# Altium PCB left_conn.PcbDoc
Units mm, origin at the board's own origin, x right, y up, seen from the top; angles counter-clockwise.
Board outline 104.91 x 135.55 mm, 4 copper layers (Top Layer, Mid-Layer 1, Mid-Layer 2, Bottom Layer), stack 1.58 mm thick; 4 components, 59 nets, 182 pads, 122 vias.
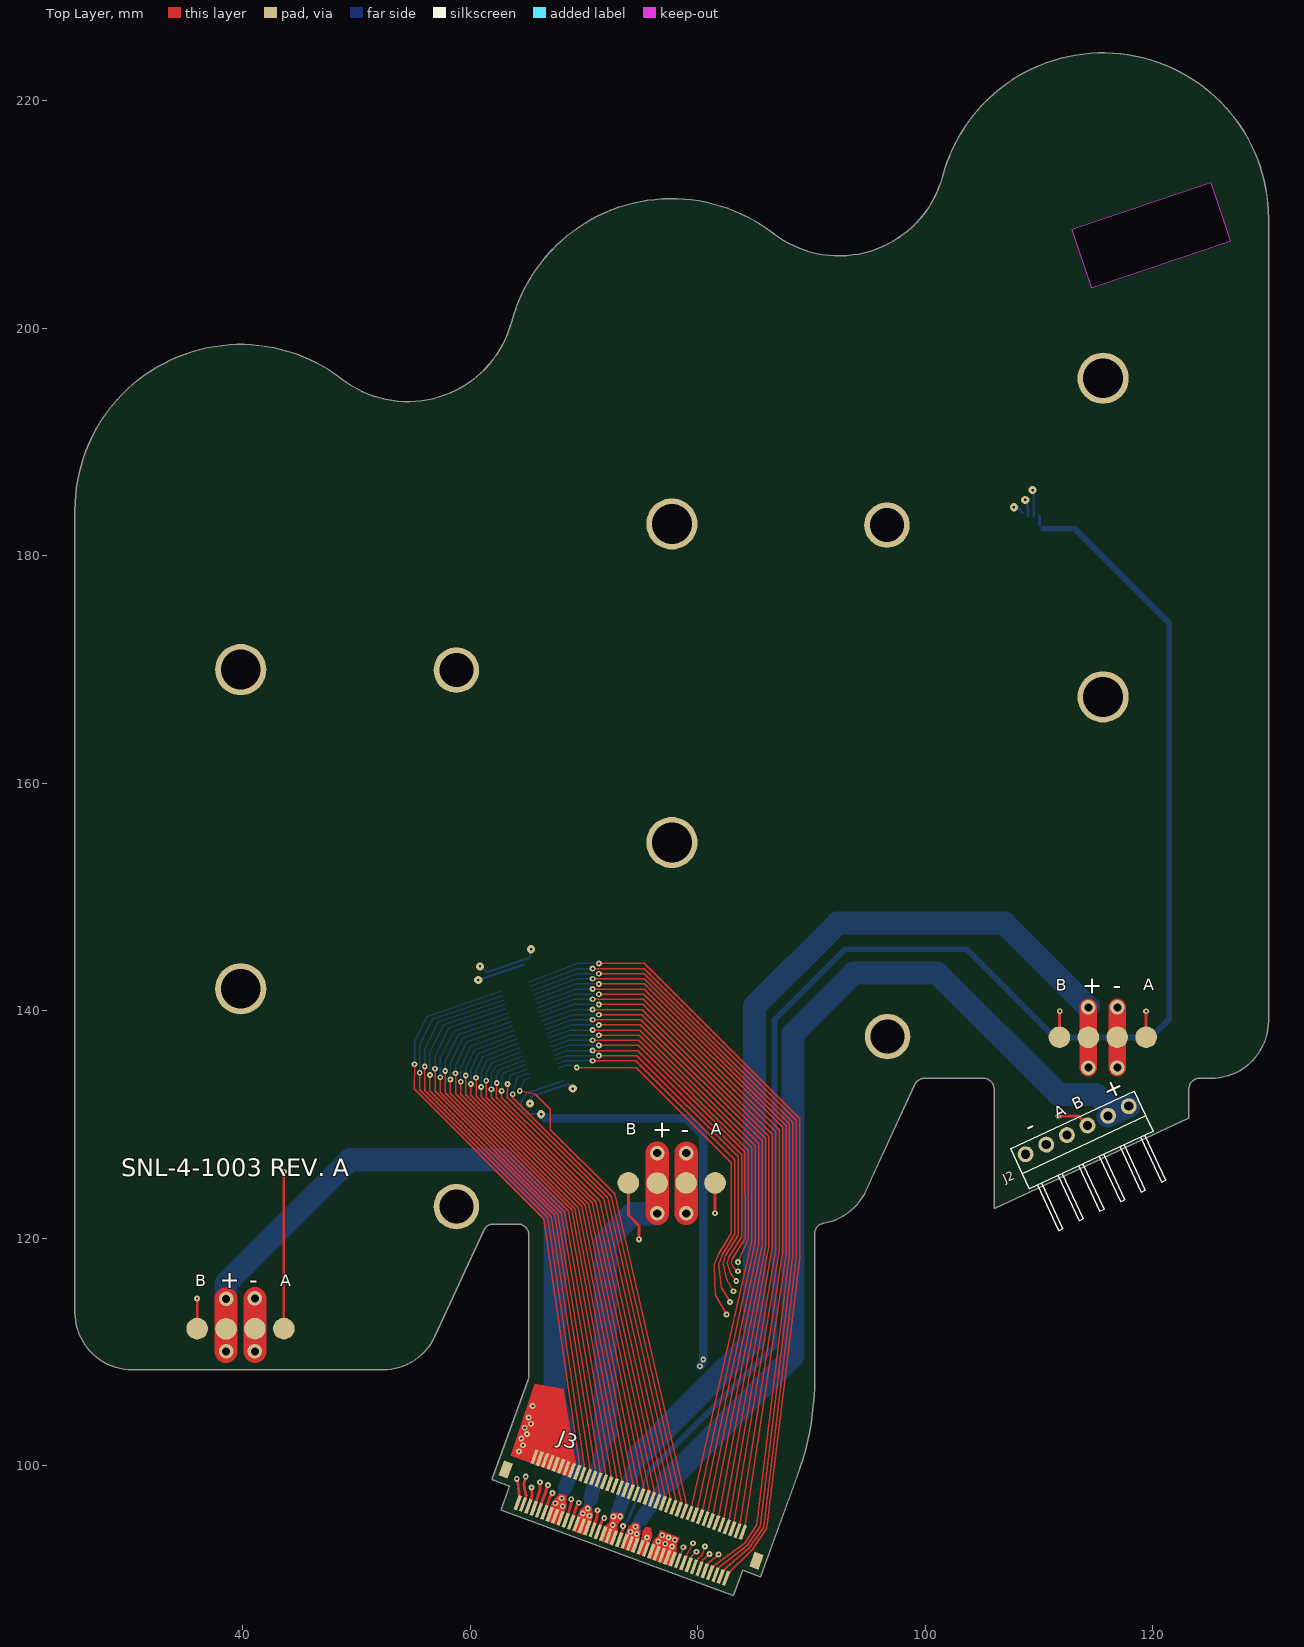
[diagram p0: Top Layer view]
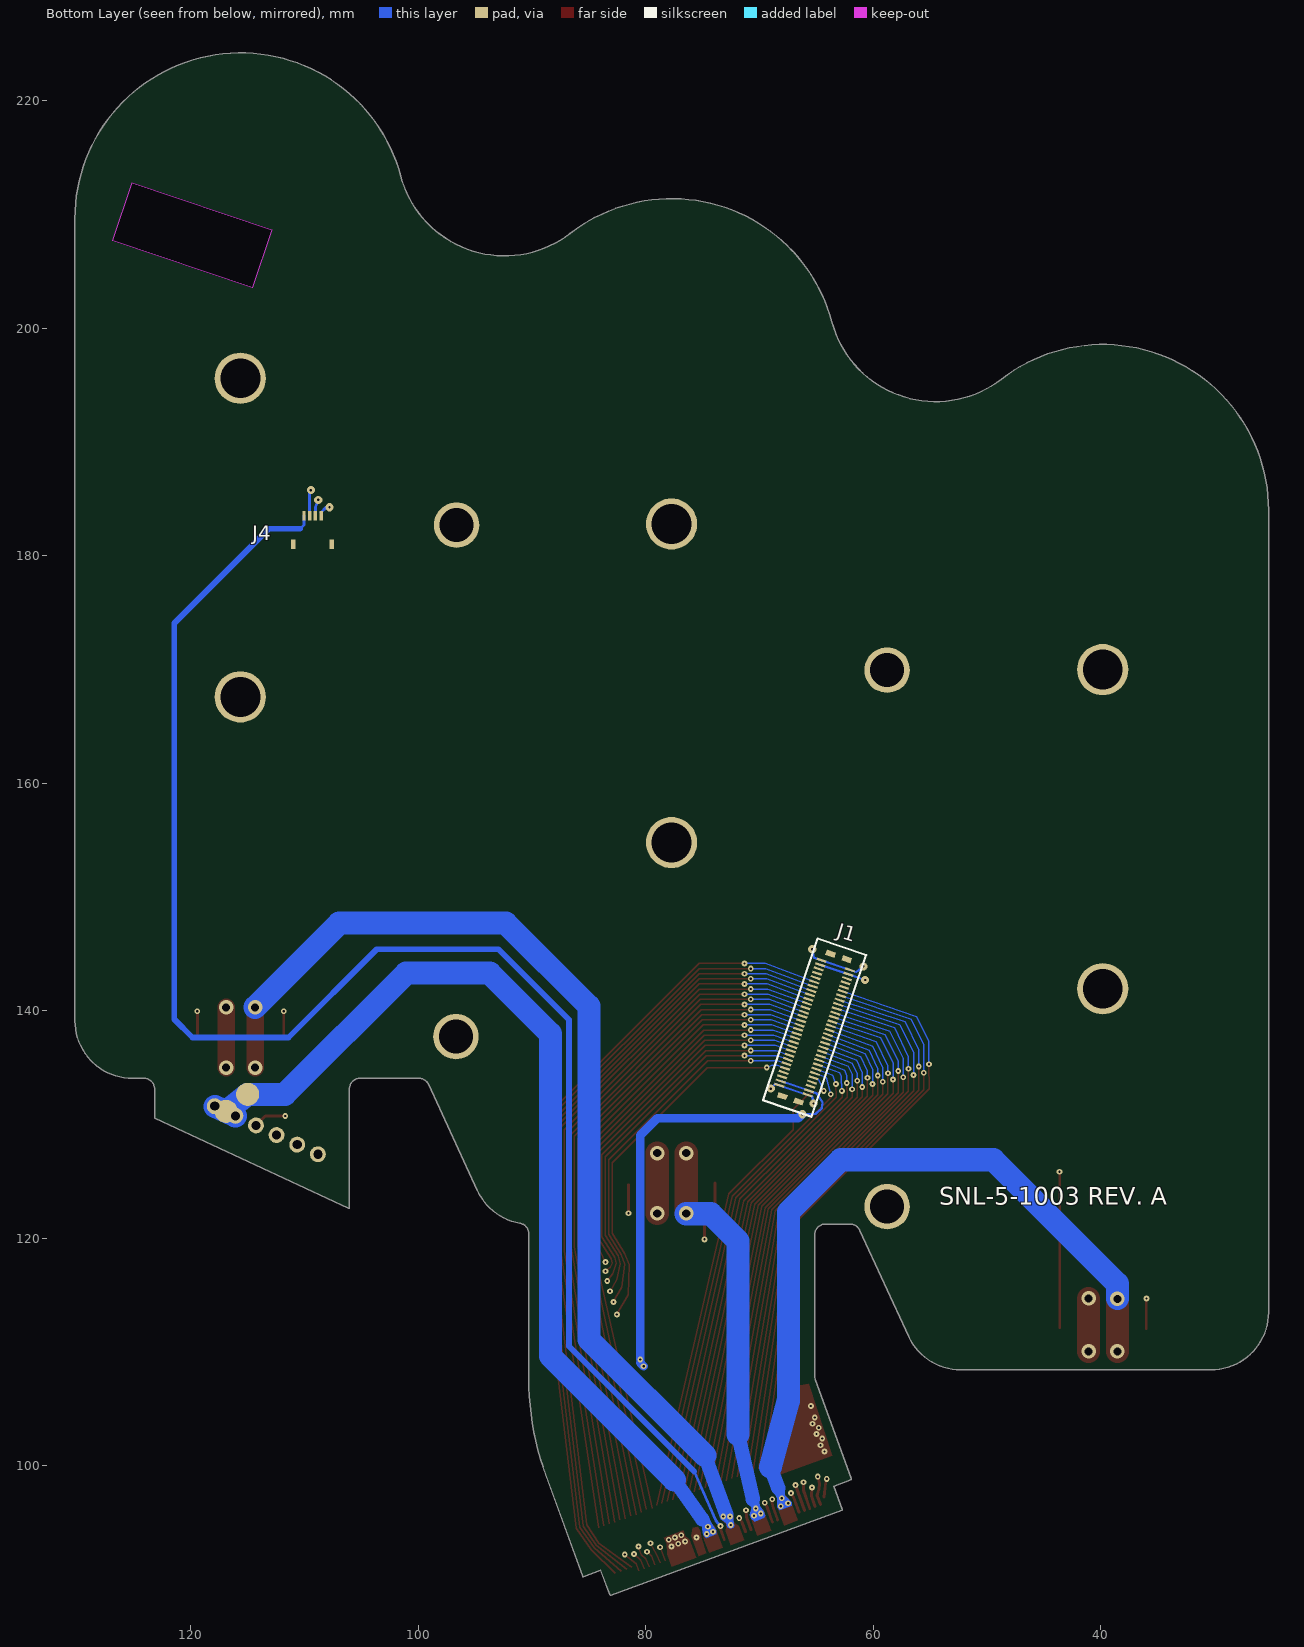
[diagram p1: Bottom Layer view, seen from below]
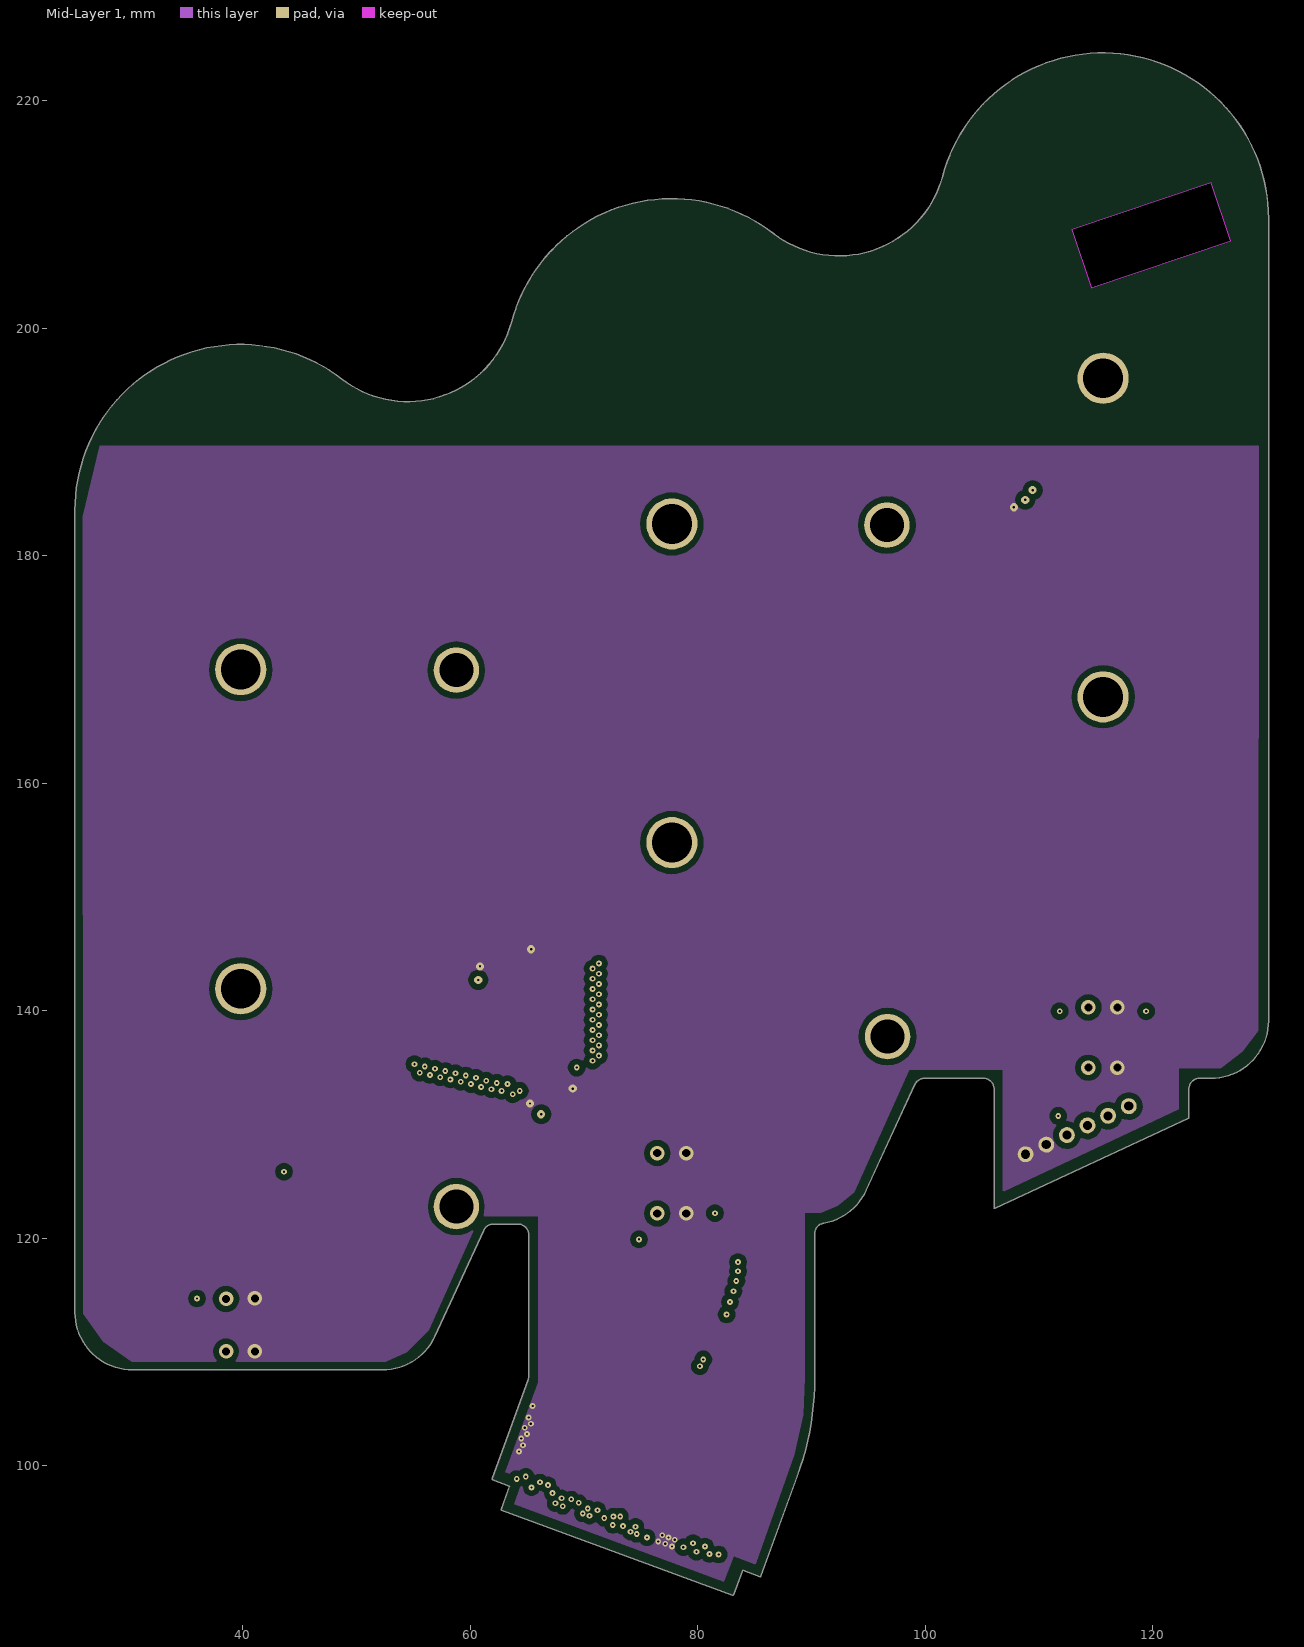
[diagram p2: Mid-Layer 1]
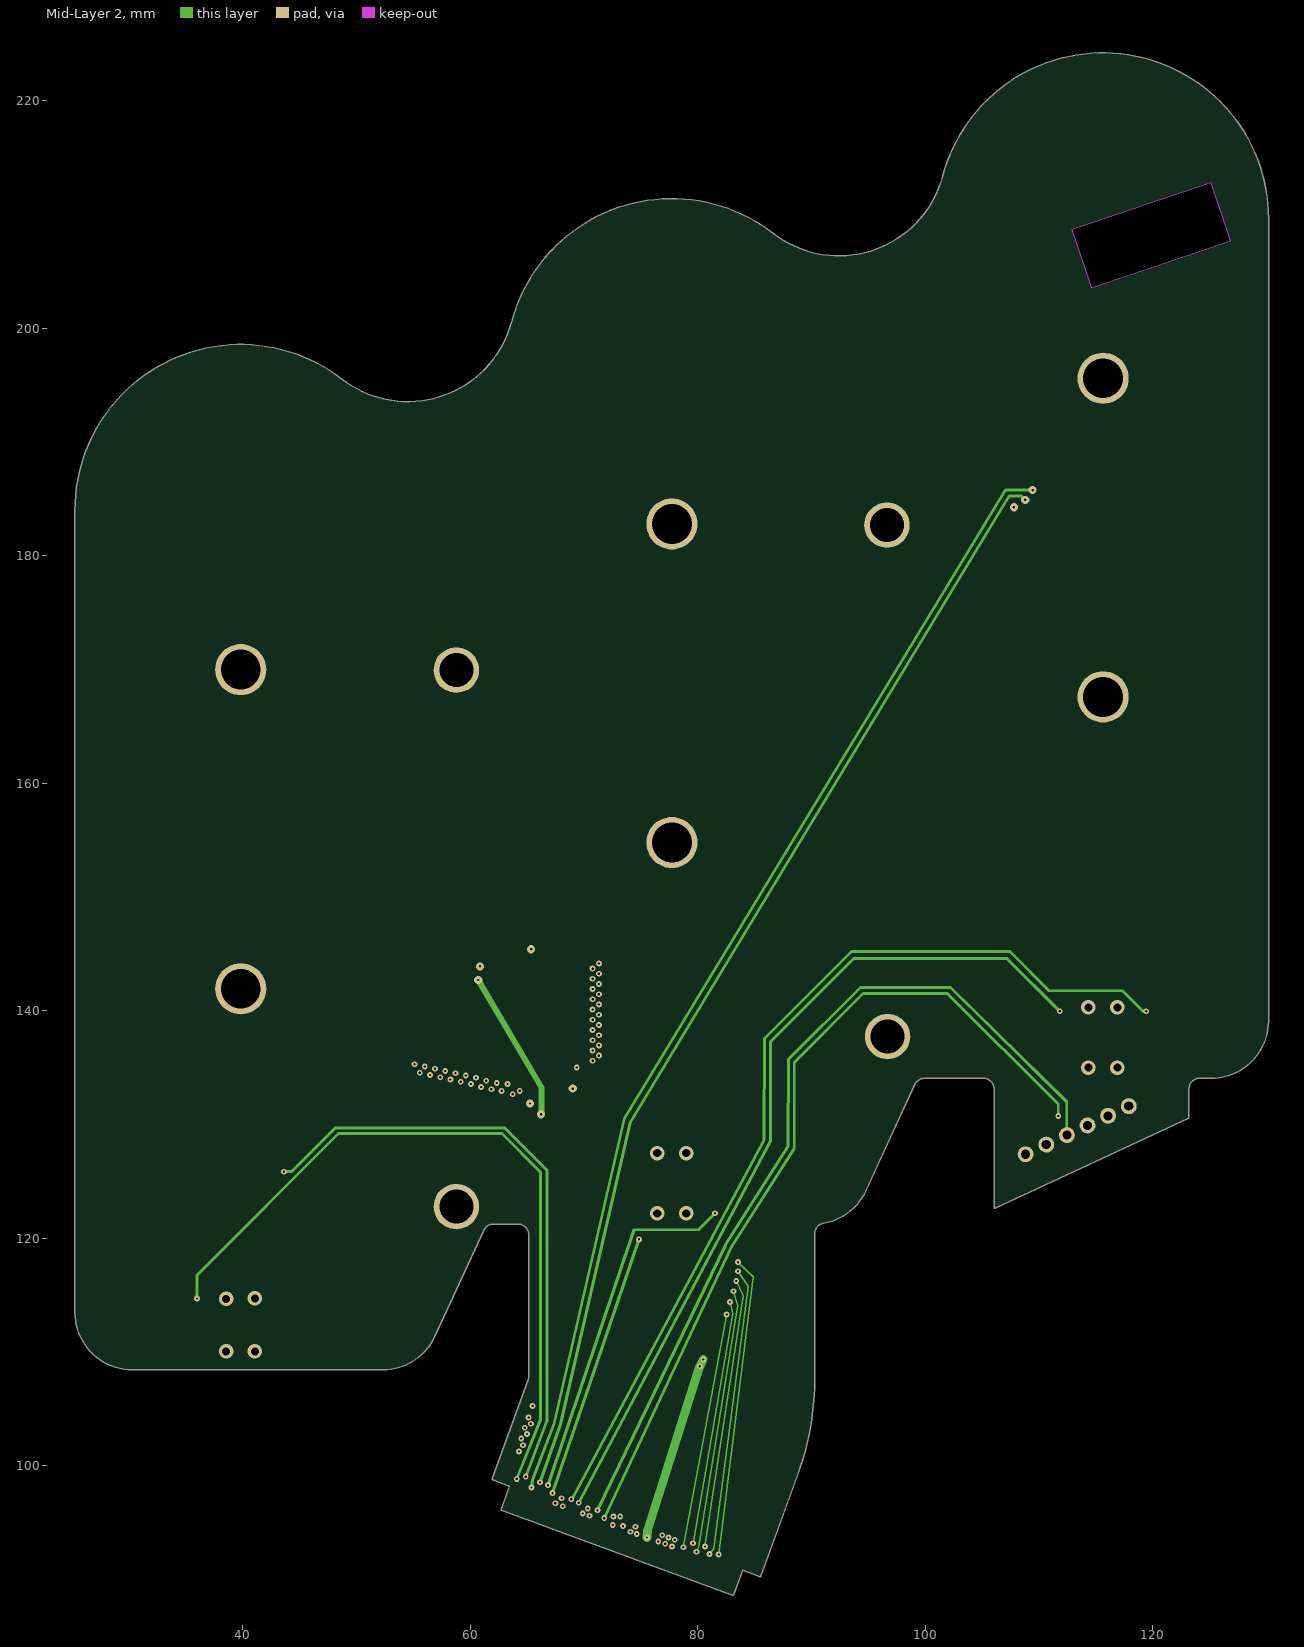
[diagram p3: Mid-Layer 2]

## Layer stack, top to bottom
Top Layer: signal copper 0.0356
Dielectric: prepreg 0.2286, FR-4, Dk 4.8
Mid-Layer 1: signal copper 0.0178
Dielectric: core 1.016, FR-4, Dk 4.8
Mid-Layer 2: signal copper 0.0178
Dielectric: prepreg 0.2286, FR-4, Dk 4.8
Bottom Layer: signal copper 0.0356

## Board outline
61.977,98.79 ccw(c62,98.85) 61.977,98.79 63.469,98.213 62.74,96.171 ccw(c62.8,96.15) 62.778,96.09 ccw(c62.8,96.15) 62.778,96.09 83.078,88.64 cw(c83.1,88.7) 83.078,88.64 ccw(c83.1,88.7) 83.16,88.677 83.987,90.818 85.485,90.249 ccw(c85.508,90.309) 85.568,90.287 88.78,99.143 ccw(c88.72,99.165) 88.781,99.143 ccw(c65.228,107.715) 90.292,107.715 ccw(c90.228,107.715) 90.292,107.715 90.292,120.395 cw(c91.228,120.395) 91.068,121.317 ccw(c90.204,126.307) 94.804,124.191 99.09,133.511 ccw(c99.032,133.537) 99.091,133.511 cw(c99.941,133.12) 99.941,134.056 105.12,134.056 cw(c105.12,133.12) 106.057,133.12 106.057,122.692 ccw(c106.12,122.692) 106.147,122.634 123.147,130.562 ccw(c123.12,130.62) 123.184,130.62 123.184,133.12 cw(c124.12,133.12) 124.12,134.056 125.12,134.056 ccw(c125.12,139.12) 130.184,139.12 130.184,209.62 ccw(c115.62,209.62) 101.545,213.358 ccw(c101.606,213.342) 101.544,213.358 ccw(c92.425,215.781) 101.545,213.358 101.544,213.358 cw(c92.425,215.781) 86.646,208.321 ccw(c77.728,196.807) 63.652,200.546 cw(c54.532,202.968) 48.754,195.508 cw(c54.532,202.968) 48.754,195.508 cw(c48.715,195.457) 48.754,195.508 ccw(c39.836,183.994) 25.272,183.994 25.272,113.494 ccw(c30.336,113.494) 30.336,108.43 52.311,108.43 ccw(c52.311,113.494) 56.912,111.378 61.198,120.698 ccw(c61.14,120.725) 61.198,120.698 cw(c62.048,120.307) 62.048,121.243 64.228,121.243 cw(c64.228,120.307) 65.164,120.307 65.164,107.892 cw(c64.228,107.892) 65.108,107.571 cw(c65.168,107.55) 65.108,107.571 61.94,98.872 ccw(c62,98.85) 61.94,98.872 ccw(c62,98.85)
cut-out: 114.611,203.555 126.851,207.693 125.137,212.763 112.897,208.624

## Design rules (kind name [scope] priority, off if disabled: settings)
Clearance Clearance_2 [InNamedPolygon('gnd')] p1: gap=0.508
Clearance [All] p2: gap=0.127
HoleSize [All] p1: absolutevalues=TRUE maxlimit=3.81 minlimit=0.025 maxpercent=80.000 minpercent=20.000
MinimumSolderMaskSliver [All] p1: minsoldermaskwidth=0.025
PlaneConnect [All] p1: planeconnectstyle=Direct reliefexpansion=0.508 reliefentries=4 reliefconductorwidth=0.254 reliefairgap=0.254
PolygonConnect [All] p1: connectstyle=Direct reliefconductorwidth=0.254 reliefentries=4 polygonreliefangle="90 Angle" airgapwidth=0.254
RoutingVias [All] p1: holewidth=0.203 width=0.508 viastyle="Through Hole" minholewidth=0.203 minwidth=0.508 maxholewidth=0.711 maxwidth=1.27
SilkToSilkClearance [All] p1: silktosilkclearance=0.025
SilkscreenOverComponentPads [All] p1: minsilkscreentomaskgap=0.025
SolderMaskExpansion [All] p1: expansion=0.102
Width [All] p1: maxlimit=2.54 minlimit=0.127 preferedwidth=0.127
23 further rules are at their usual default settings.

## Classes and differential pairs
component class mobo_connector: J3
component class thumb_connector: J2
component class camera_connector: J1
component class palm_connector: J4

## Components (designator, comment, footprint, x,y, rotation, side; value= is the part's Value field where it differs from the comment)
J1 "Header 30X2" MOLEX_55909_0674_PLUG_60 65.174,138.51 r198.68 bottom locked
J2 "Header 6" 3M_951106_7622_AR 108.833,127.381 r25 top
J3 "header_40x2" JST-80PS-JMDSS-G-1-TF 65,99 r70 top
J4 "FH19C-4S-0.5SH(05)" FH19C-4S-0.5SH(05) 110.05,183.5 r180 bottom

## Footprints (in the part's own frame and the unit in brackets; to place one, negate y for a bottom-side part, rotate by r counter-clockwise, add the part's x,y. Pads: shape width x height; smd on the part's side, far side on the other; paste and mask are expansions set on the pad)
3M_951106_7622_AR [mm]
  round 1.4 hole 0.8: 1(0,0) 2(2,0) 3(4,0) 4(6,0) 5(8,0) 6(10,0)
  silkscreen extent -1,-7.3 11,1, body extent -1,-7.27 11,0.28, height 2
FH19C-4S-0.5SH(05) [mm]
  rect 0.3x0.8 smd: 1(0,0) 2(0.5,0) 3(1,0) 4(1.5,0)
  rect 0.4x0.8 smd: MNT(-0.95,-2.5) MNT(2.45,-2.5)
  body extent -1.25,-3.3 2.75,0.2, height 0.9
JST-80PS-JMDSS-G-1-TF [mm]
  rect 1.35x0.3 smd: 1(-2.375,0) 2(1.925,0) 3(-2.375,-0.5) 4(1.925,-0.5) 5(-2.375,-1) 6(1.925,-1) 7(-2.375,-1.5) 8(1.925,-1.5) 9(-2.375,-2) 10(1.925,-2) 11(-2.375,-2.5) 12(1.925,-2.5) 13(-2.375,-3) 14(1.925,-3) 15(-2.375,-3.5) 16(1.925,-3.5) 17(-2.375,-4) 18(1.925,-4) 19(-2.375,-4.5) 20(1.925,-4.5) 21(-2.375,-5) 22(1.925,-5) 23(-2.375,-5.5) 24(1.925,-5.5) 25(-2.375,-6) 26(1.925,-6) 27(-2.375,-6.5) 28(1.925,-6.5) 29(-2.375,-7) 30(1.925,-7) 31(-2.375,-7.5) 32(1.925,-7.5) 33(-2.375,-8) 34(1.925,-8) 35(-2.375,-8.5) 36(1.925,-8.5) 37(-2.375,-9) 38(1.925,-9) 39(-2.375,-9.5) 40(1.925,-9.5) 41(-2.375,-10) 42(1.925,-10) 43(-2.375,-10.5) 44(1.925,-10.5) 45(-2.375,-11) 46(1.925,-11) 47(-2.375,-11.5) 48(1.925,-11.5) 49(-2.375,-12) 50(1.925,-12) 51(-2.375,-12.5) 52(1.925,-12.5) 53(-2.375,-13) 54(1.925,-13) 55(-2.375,-13.5) 56(1.925,-13.5) 57(-2.375,-14) 58(1.925,-14) 59(-2.375,-14.5) 60(1.925,-14.5) 61(-2.375,-15) 62(1.925,-15) 63(-2.375,-15.5) 64(1.925,-15.5) 65(-2.375,-16) 66(1.925,-16) 67(-2.375,-16.5) 68(1.925,-16.5) 69(-2.375,-17) 70(1.925,-17) 71(-2.375,-17.5) 72(1.925,-17.5) 73(-2.375,-18) 74(1.925,-18) 75(-2.375,-18.5) 76(1.925,-18.5) 77(-2.375,-19) 78(1.925,-19) 79(-2.375,-19.5) 80(1.925,-19.5)
  rect 1.4x0.85 smd: MNT(0,-21.475) MNT(0,1.975)
  body extent -2.8,-21.8 2.35,2.3, height 4.79
MOLEX_55909_0674_PLUG_60 [mm]
  rect 0.9x0.22 smd: 1(-1.315,5.8) 2(1.315,5.8) 3(-1.315,5.4) 4(1.315,5.4) 5(-1.315,5) 6(1.315,5) 7(-1.315,4.6) 8(1.315,4.6) 9(-1.315,4.2) 10(1.315,4.2) 11(-1.315,3.8) 12(1.315,3.8) 13(-1.315,3.4) 14(1.315,3.4) 15(-1.315,3) 16(1.315,3) 17(-1.315,2.6) 18(1.315,2.6) 19(-1.315,2.2) 20(1.315,2.2) 21(-1.315,1.8) 22(1.315,1.8) 23(-1.315,1.4) 24(1.315,1.4) 25(-1.315,1) 26(1.315,1) 27(-1.315,0.6) 28(1.315,0.6) 29(-1.315,0.2) 30(1.315,0.2) 31(-1.315,-0.2) 32(1.315,-0.2) 33(-1.315,-0.6) 34(1.315,-0.6) 35(-1.315,-1) 36(1.315,-1) 37(-1.315,-1.4) 38(1.315,-1.4) 39(-1.315,-1.8) 40(1.315,-1.8) 41(-1.315,-2.2) 42(1.315,-2.2) 43(-1.315,-2.6) 44(1.315,-2.6) 45(-1.315,-3) 46(1.315,-3) 47(-1.315,-3.4) 48(1.315,-3.4) 49(-1.315,-3.8) 50(1.315,-3.8) 51(-1.315,-4.2) 52(1.315,-4.2) 53(-1.315,-4.6) 54(1.315,-4.6) 55(-1.315,-5) 56(1.315,-5) 57(-1.315,-5.4) 58(1.315,-5.4) 59(-1.315,-5.8) 60(1.315,-5.8)
  rect 0.85x0.5 smd: MNT(-0.75,6.6) MNT(-0.75,-6.6) MNT(0.75,6.6) MNT(0.75,-6.6)
  silkscreen extent -2.25,-7.5 2.25,7.5, body extent -1.56,-7 1.57,7, height 1.17

## Part data
J1: "Header, 30-Pin, Dual row"
J2: "Header, 6-Pin"
J4: library part "Header 4", "Header, 4-Pin"

## Free pads (board coordinates)
  round 2.032 smd far side: EndPad(116.9,131.15) StartPad(115,132.65)
  round 1.9 smd paste-10: F0_A(119.424,137.67) F0_B(111.804,137.67) F1_A(81.534,124.86) F1_B(73.914,124.86) F1_POWER(76.454,124.85) F2_A(43.634,112.05) F2_B(36.014,112.05) F2_POWER(38.554,112.04) GND(41.094,112.05) GND(78.994,124.86) GND(114.344,137.66) GND(116.884,137.67)
  round 4.5 hole 3.5: MNT(39.844,141.93) MNT(39.844,169.98) MNT(77.744,154.78) MNT(77.744,182.78) MNT(115.644,167.58) MNT(115.644,195.58)
  round 4 hole 3: MNT(58.794,122.78) MNT(58.794,169.93) MNT(96.644,182.68) MNT(96.694,137.73)

## Via types
v1: diameter 0.508, hole 0.203, Top Layer to Bottom Layer, tented both sides, 101 vias
v2: diameter 1.27, hole 0.711, Top Layer to Bottom Layer, tented both sides, 12 vias
v3: diameter 0.711, hole 0.203, Top Layer to Bottom Layer, tented both sides, 9 vias

## Nets (pads, with @x,y where several pads share a name; then routed paths per layer and width w, separated by ;. In a path a pad name is that pad's centre, name@x,y a point inside that pad or via, vN(x,y) a via of type N, cw(c..) or ccw(c..) an arc to the next point about the centre after c; other vN are vias at no path point)
9V: J3.39 J4.1 | length 142.6
  Top Layer w0.254: J3.39 73.45,94.45 v1(73.45,94.7)
  Bottom Layer w0.254: v1(73.45,94.7) 73.85,95.2 75.75,99.5 ; J4.1 110.05,182.7 110.4,182.35
  Bottom Layer w0.508: 75.75,99.5 86.75,110.5 86.75,139.2 92.95,145.4 103.65,145.4 111.4,137.65 119.85,137.65 121.45,139.25 121.45,174.05 113.15,182.35 110.4,182.35
CAM_D0_0: J1.18 J3.24 | length 50.2
  Top Layer w0.127: v1(56.474,134.35) 56.474,132.95 67.424,122 J3.24@71.05,99.4
  Bottom Layer w0.127: v1(56.474,134.35) 56.474,136.35 57.696,138.773 J1.18
CAM_D0_1: J1.15 J3.75 | length 69.7
  Top Layer w0.127: v1(71.324,143.25) 75.324,143.25 88.374,130.2 88.374,118.45 85.5,94.7 84.35,93 J3.75@81.7,90.9
  Bottom Layer w0.127: J1.15 69.424,143.25 v1(71.324,143.25)
CAM_D1_0: J1.22 J3.28 | length 49.2
  Top Layer w0.127: v1(57.374,134.15) 57.374,132.85 68.024,122.2 J3.28@71.978,99.05
  Bottom Layer w0.127: v1(57.374,134.15) 57.374,135.8 58.57,138.196 J1.22
CAM_D1_1: J1.23 J3.76 | length 61.3
  Top Layer w0.127: v1(71.324,141.45) 75.274,141.45 87.174,129.55 87.174,118.9 J3.76@83.2,94.9
  Bottom Layer w0.127: J1.23 69.224,141.45 v1(71.324,141.45)
CAM_D2_0: J1.16 J3.22 | length 50.6
  Top Layer w0.127: v1(56.024,135.1) 56.024,133 60.274,128.75 67.124,121.9 J3.22@70.55,99.6
  Bottom Layer w0.127: v1(56.024,135.1) 56.024,136.55 57.224,139.05 J1.16
CAM_D2_1: J1.17 J3.73 | length 68.9
  Top Layer w0.127: v1(70.774,142.8) 75.324,142.8 88.074,130.05 88.074,118.55 85.2,94.8 84.15,93.2 J3.73@81.25,91.1
  Bottom Layer w0.127: J1.17 69.374,142.8 v1(70.774,142.8)
CAM_D3_0: J1.14 J3.20 | length 51.1
  Top Layer w0.127: v1(55.574,134.55) 55.574,133.05 66.824,121.8 J3.20@70.1,99.75
  Bottom Layer w0.127: v1(55.574,134.55) 55.574,137 56.692,139.247 J1.14
CAM_D3_1: J1.19 J3.80 | length 63.1
  Top Layer w0.127: v1(71.324,142.35) 75.324,142.35 87.774,129.9 87.774,118.65 J3.80@84.15,94.55
  Bottom Layer w0.127: J1.19 69.324,142.35 v1(71.324,142.35)
CAM_D4_0: J1.28 J3.34 | length 47.8
  Top Layer w0.127: v1(58.724,134.5) 58.724,132.7 68.924,122.5 J3.34@73.4,98.55
  Bottom Layer w0.127: v1(58.724,134.5) 58.724,135.15 59.732,137.25 J1.28
CAM_D4_1: J1.21 J3.78 | length 62.2
  Top Layer w0.127: v1(70.774,141.9) 75.324,141.9 87.474,129.75 87.474,118.8 J3.78@83.7,94.75
  Bottom Layer w0.127: J1.21 69.274,141.9 v1(70.774,141.9)
CAM_D5_0: J1.24 J3.30 | length 48.7
  Top Layer w0.127: v1(57.824,134.7) 57.824,132.8 68.324,122.3 J3.30@72.45,98.9
  Bottom Layer w0.127: v1(57.824,134.7) 57.824,135.55 58.974,137.9 J1.24
CAM_D5_1: J1.43 J3.69 | length 59
  Top Layer w0.127: v1(71.324,136.95) 74.768,136.956 84.155,127.608 84.174,120 83.05,118.2 82.95,117.8 83.15,117.45 v1(83.55,117.1) ; J3.69 80.45,91.7 v1(81.05,92.25)
  Mid-Layer 2 w0.127: v1(81.05,92.25) 81.4,92.7 84.45,115.8 v1(83.55,117.1)
  Bottom Layer w0.127: J1.43 68.624,136.95 v1(71.324,136.95)
CAM_D6_0: J1.38 J3.44 | length 45.6
  Top Layer w0.127: v1(60.974,133.3) 60.974,132.45 70.424,123 J3.44@75.75,97.7
  Bottom Layer w0.127: v1(60.974,133.3) 60.974,134.55 61.467,135.652 J1.38
CAM_D6_1: J1.45 J3.67 | length 57.8
  Top Layer w0.127: v1(70.774,136.5) 74.724,136.5 83.874,127.35 83.874,120.15 82.75,118.35 82.6,117.8 82.9,116.9 v1(83.4,116.25) ; J3.67 80,91.85 80.4,92.2 v1(80.65,92.9)
  Mid-Layer 2 w0.127: v1(80.65,92.9) 84,114.95 v1(83.4,116.25)
  Bottom Layer w0.127: J1.45 68.524,136.5 v1(70.774,136.5)
CAM_D7_0: J1.40 J3.46 | length 45.2
  Top Layer w0.127: v1(61.424,133.85) 61.424,132.4 70.724,123.1 J3.46@76.25,97.6
  Bottom Layer w0.127: v1(61.424,133.85) 61.424,134.45 61.86,135.4 J1.40
CAM_D7_1: J1.51 J3.61 | length 54.9
  Top Layer w0.127: v1(69.374,135) 74.624,135 82.978,126.647 82.978,120.45 81.85,118.65 81.45,117.65 81.55,115.05 v1(82.55,113.3) ; J3.61 v1(78.75,92.85)
  Mid-Layer 2 w0.127: v1(78.75,92.85) v1(82.55,113.3)
  Bottom Layer w0.127: J1.51 68.474,135.2 68.924,135.2 v1(69.374,135)
CAM_D8_0: J1.44 J3.50 | length 44.5
  Top Layer w0.127: v1(62.35,133.65) 62.3,132.4 71.4,123.3 J3.50@77.15,97.2
  Bottom Layer w0.127: v1@62.324,133.5 v1(62.35,133.65) 62.324,134.3 62.528,134.761 J1.44
CAM_D8_1: J1.47 J3.65 | length 56.8
  Top Layer w0.127: v1(71.324,136.05) 74.674,136.05 83.574,127.15 83.574,120.25 82.45,118.45 82.25,117.75 82.55,116.35 v1(83.15,115.35) ; J3.65 79.5,92.05 v1(79.9,92.45)
  Mid-Layer 2 w0.127: v1(79.9,92.45) 80.1,92.9 83.55,114.1 v1(83.15,115.35)
  Bottom Layer w0.127: J1.47 68.474,136.05 v1(71.324,136.05)
CAM_D9_0: J1.46 J3.52 | length 44
  Top Layer w0.127: v1(62.774,132.95) 62.75,132.4 71.75,123.45 J3.52@77.65,97
  Bottom Layer w0.127: v1@62.777,132.953 62.85,134.25 62.974,134.55 J1.46
CAM_D9_1: J1.49 J3.63 | length 55.8
  Top Layer w0.127: v1(70.774,135.6) 74.574,135.6 83.278,126.897 83.274,120.35 82.15,118.55 81.85,117.7 82.1,115.7 v1(82.85,114.4) ; J3.63 79.05,92.2 v1(79.6,93.2)
  Mid-Layer 2 w0.127: v1(79.6,93.2) 83.1,113.35 v1(82.85,114.4)
  Bottom Layer w0.127: J1.49 68.424,135.6 v1(70.774,135.6)
CAM_EN_0: J1.12 J3.18 | length 51.6
  Top Layer w0.127: v1(55.124,135.3) 55.1,133.15 66.5,121.7 J3.18@69.65,99.95
  Bottom Layer w0.127: v1(55.124,135.3) 55.124,137.3 56.174,139.446 J1.12
CAM_EN_1: J1.11 J3.79 | length 71.1
  Top Layer w0.127: v1(71.324,144.15) 75.324,144.15 88.974,130.5 88.974,118.2 86.1,94.5 84.8,92.6 J3.79@82.7,90.55
  Bottom Layer w0.127: J1.11 69.524,144.15 v1(71.324,144.15)
CAM_EXPOSURE_0: J1.52 J3.58 | length 42.7
  Top Layer w0.127: v1(64.374,132.95) 65.75,132.65 67.05,131.35 67.05,129.55 72.7,123.9 J3.58@79.05,96.55
  Bottom Layer w0.127: v1(64.374,132.95) 64.813,133.933 J1.52
CAM_EXPOSURE_1: J1.39 J3.60 | length 54.3
  Top Layer w0.127: v1(71.324,137.85) 74.874,137.85 84.774,127.95 84.774,119.8 J3.60@79.45,96.25
  Bottom Layer w0.127: J1.39 68.774,137.85 v1(71.324,137.85)
CAM_FRAME_VALID_0: J1.42 J3.48 | length 44.8
  Top Layer w0.127: v1(61.874,133.1) 61.85,132.4 71.05,123.2 J3.48@76.7,97.35
  Bottom Layer w0.127: v1(61.874,133.1) 61.874,134.4 62.215,135.128 J1.42
CAM_FRAME_VALID_1: J1.25 J3.74 | length 60.5
  Top Layer w0.127: v1(70.774,141) 75.224,141 86.874,129.35 86.874,119 J3.74@82.75,95.05
  Bottom Layer w0.127: J1.25 69.174,141 v1(70.774,141)
CAM_LINE_VALID_0: J1.48 J3.54 | length 43.3
  Top Layer w0.127: v1(63.3,133.55) 63.25,132.4 72.1,123.55 J3.54@78.139,96.898
  Bottom Layer w0.127: v1(63.3,133.55) 63.58,134.315 J1.48
CAM_LINE_VALID_1: J1.41 J3.71 | length 59.9
  Top Layer w0.127: v1(70.774,137.4) 74.824,137.4 84.474,127.75 84.474,119.9 v1(83.55,117.9) ; J3.71 80.85,91.4 v1(81.85,92.2)
  Mid-Layer 2 w0.127: v1(81.85,92.2) 84.9,116.6 v1(83.55,117.9)
  Bottom Layer w0.127: J1.41 68.674,137.4 v1(70.774,137.4)
CAM_PCLK_0: J1.32 J3.38 | length 46.9
  Top Layer w0.127: v1(59.624,134.3) 59.624,132.6 69.524,122.7 J3.38@74.35,98.2
  Bottom Layer w0.127: v1@59.624,134.35 59.624,134.9 60.373,136.544 J1.32
CAM_PCLK_1: J1.29 J3.70 | length 58.7
  Top Layer w0.127: v1(70.774,140.1) 75.124,140.1 86.274,128.95 86.274,119.25 J3.70@81.8,95.35
  Bottom Layer w0.127: J1.29 69.074,140.1 v1(70.774,140.1)
CAM_PWR: J1.3 J1.4 J1.57 J1.58 J3.47 J3.49 | length 75.8
  Mid-Layer 2 w0.508: v3(60.724,142.7) 66.274,133.25 v3@66.274,130.9
  Mid-Layer 2 w0.762: v1(75.55,93.7) 75.6,94.3 v1@80.178,108.757 ; v1(80.2,108.75) v1(80.5,109.35)
  Bottom Layer w0.203: v3(60.724,142.7) J1.4 J1.3 ; v3(66.25,130.9) 65.05,130.95 64.55,131.4 64.474,131.95 65.024,132.75 J1.58 J1.57
  Bottom Layer w0.762: v3(66.25,130.9) 66.6,130.55 79,130.55 80.5,129.05 v1(80.5,109.35) ; v1(80.2,108.75) 80.5,109.05
CAM_RESET_0: J1.26 J3.32 | length 48.3
  Top Layer w0.127: v1(58.274,133.95) 58.274,132.75 68.624,122.4 J3.32@72.95,98.7
  Bottom Layer w0.127: v1(58.274,133.95) 58.274,135.4 59.365,137.603 J1.26
CAM_RESET_1: J1.35 J3.64 | length 56
  Top Layer w0.127: v1(71.324,138.75) 74.974,138.75 85.374,128.35 85.374,119.55 J3.64@80.4,95.9
  Bottom Layer w0.127: J1.35 68.924,138.75 v1(71.324,138.75)
CAM_SCL: J1.31 J3.68 | length 57.8
  Top Layer w0.127: v1(71.324,139.65) 75.074,139.65 85.974,128.75 85.974,119.35 J3.68@81.35,95.6
  Bottom Layer w0.127: J1.31 69.024,139.65 v1(71.324,139.65)
CAM_SDA: J1.30 J3.36 | length 47.3
  Top Layer w0.127: v1(59.174,133.75) 59.174,132.65 69.224,122.6 J3.36@73.85,98.4
  Bottom Layer w0.127: v1(59.174,133.75) 59.174,135 60.058,136.894 J1.30
CAM_STFRM_0: J1.36 J3.42 | length 46.1
  Top Layer w0.127: v1(60.524,134.1) 60.524,132.5 70.124,122.9 J3.42@75.3,97.9
  Bottom Layer w0.127: v1(60.524,134.1) 60.524,134.7 61.104,135.969 J1.36
CAM_STFRM_1: J1.33 J3.66 | length 57
  Top Layer w0.127: v1(70.774,139.2) 75.024,139.2 85.674,128.55 85.674,119.45 J3.66@80.85,95.7
  Bottom Layer w0.127: J1.33 68.974,139.2 v1(70.774,139.2)
CAM_STLN_0: J1.50 J3.56 | length 42.9
  Top Layer w0.127: v1(63.75,132.65) 63.7,132.4 72.4,123.7 J3.56@78.6,96.7
  Bottom Layer w0.127: v1(63.75,132.65) 64.15,134.15 J1.50
CAM_STLN_1: J1.27 J3.72 | length 59.5
  Top Layer w0.127: v1(71.324,140.55) 75.174,140.55 86.574,129.15 86.574,119.15 J3.72@82.3,95.25
  Bottom Layer w0.127: J1.27 69.124,140.55 v1(71.324,140.55)
CAM_STROBE_0: J1.34 J3.40 | length 46.5
  Top Layer w0.127: v1(60.074,133.55) 60.074,132.55 69.824,122.8 J3.40@74.8,98.05
  Bottom Layer w0.127: v1(60.074,133.55) 60.074,134.8 60.7,136.207 J1.34
CAM_STROBE_1: J1.37 J3.62 | length 55
  Top Layer w0.127: v1(70.774,138.3) 74.924,138.3 85.074,128.15 85.074,119.7 J3.62@79.95,96.2
  Bottom Layer w0.127: J1.37 68.824,138.3 v1(70.774,138.3)
CAM_SYSCLK_0: J1.20 J3.26 | length 49.6
  Top Layer w0.127: v1(56.924,134.9) 56.924,132.9 67.724,122.1 J3.26@71.5,99.2
  Bottom Layer w0.127: v1(56.924,134.9) 56.924,135.95 58.124,138.5 J1.20@63.124,140.15
CAM_SYSCLK_1: J1.13 J3.77 | length 70.4
  Top Layer w0.127: v1(70.774,143.7) 75.324,143.7 88.674,130.35 88.674,118.35 85.8,94.6 84.55,92.8 J3.77@82.15,90.75
  Bottom Layer w0.127: J1.13 69.474,143.7 v1(70.774,143.7)
F0_A: J3.19 pad.F0_A | length 87.5
  Top Layer w0.254: J3.19 68.8,96.3 v1@68.95,97 ; pad.F0_A@119.424,137.95 v1(119.424,139.95)
  Mid-Layer 2 w0.254: v1@68.95,97 85.85,128.65 85.874,137.55 93.524,145.2 107.45,145.2 110.9,141.75 117.35,141.75 119.15,139.95 v1(119.424,139.95)
  other v1: 68.9,97.05
F0_B: J3.21 pad.F0_B | length 79.3
  Top Layer w0.254: J3.21 69.35,96.4 v1(69.55,96.75) ; pad.F0_B@111.824,137.55 v1(111.824,139.95)
  Mid-Layer 2 w0.254: v1(69.55,96.75) 86.4,128.5 86.424,137.3 93.724,144.6 107.174,144.6 v1(111.824,139.95)
F0_POWER: J3.33 J3.35 J3.37 pad.GND@114.344,137.66 | length 89.9
  Top Layer w1.524: v2(114.344,134.99) 114.344,137.66 v2(114.344,140.29)
  Bottom Layer w1.27: 72.95,95.75 74.812,100.912
  Bottom Layer w2.032: 74.812,100.912 85,111.1 85,140.4 92.3,147.7 106.95,147.7 v2@114.35,140.3
  other v1: 72.55,94.8 72.6,95.55 73.2,95.55
F1_A: J3.9 pad.F1_A | length 36.3
  Top Layer w0.254: J3.9 v1(66.85,98.3) ; v1(81.524,122.2) pad.F1_A@81.524,124.7
  Mid-Layer 2 w0.254: v1(66.85,98.3) 74.4,120.75 80.074,120.75 v1(81.524,122.2)
F1_B: J3.11 pad.F1_B | length 30.7
  Top Layer w0.254: J3.11 67,97.2 v1(67.25,97.6) ; pad.F1_B 73.914,122.036 74.85,121.1 v1(74.85,119.9)
  Mid-Layer 2 w0.254: v1(67.25,97.6) v1(74.85,119.9)
F1_POWER: J3.23 J3.25 J3.27 pad.F1_POWER | length 33.7
  Top Layer w2.032: v2(76.454,122.18) pad.F1_POWER v2(76.454,127.48)
  Bottom Layer w1.27: 70.6,97.05 71.9,102.774
  Bottom Layer w2.032: 71.9,102.774 71.9,119.75 74.3,122.15 v2@76.45,122.15
  other v1: 70.5,95.6 69.9,95.8 70.35,96.25
F2_A: J3.3 pad.F2_A | length 69.8
  Top Layer w0.254: pad.F2_A@43.624,112.15 v1@43.624,125.85 ; J3.3 64.95,97.4 64.8,97.9 64.75,98.45 v1(64.9,99.05)
  Mid-Layer 2 w0.254: v1@43.625,125.875 44.325,125.875 48.15,129.7 63.05,129.7 66.75,126 66.75,103.9 v1(64.9,99.05)
  other v1: 43.65,125.85
F2_B: J3.1 pad.F2_B | length 70.5
  Top Layer w0.254: pad.F2_B@36.024,112.05 v1@36.024,114.7 ; v1(64.1,98.85) 64.1,98.9 64.15,98.95 J3.1@64.35,97.25
  Mid-Layer 2 w0.254: v1(36,114.7) 36,116.75 48.45,129.2 62.8,129.2 66.2,125.8 66.2,104.05 v1@64.158,98.967
F2_POWER: J3.13 J3.15 J3.17 pad.F2_POWER | length 65.9
  Top Layer w2.032: v2(38.554,110.05) pad.F2_POWER v2(38.554,114.67)
  Bottom Layer w1.27: 68.35,98.05 69.05,99.9
  Bottom Layer w2.032: v2@38.55,114.7 38.55,116 49.45,126.9 62.874,126.9 67.474,122.3 67.474,105.7 69.05,99.9
  other v1: 68.15,96.45 67.5,96.7 68.05,97.15
F3_A: J2.3 J3.29 | length 79.7
  Top Layer w0.254: J3.29 71.15,95.5 v1(71.2,96.1)
  Mid-Layer 2 w0.254: v1(71.2,96.1) 82.45,119.4 87.95,128.1 87.974,135.7 94.324,142.05 102.224,142.05 112.45,132 J2.3@112.45,129.05
F3_B: J2.4 J3.31 | length 79.2
  Top Layer w0.254: J3.31 71.55,95.05 v1(71.8,95.4) ; v1(111.7,130.75) 113.45,130.75 J2.4@114.3,129.9
  Mid-Layer 2 w0.254: v1(71.8,95.4) 82.95,119.2 88.5,127.9 88.5,135.45 94.55,141.5 101.95,141.5 111.7,131.8 111.7,131.1 v1(111.7,130.75)
F3_POWER: J2.5 J2.6 J3.41 J3.43 J3.45 pad.EndPad pad.StartPad | length 85.6
  Bottom Layer w1.27: 75.05,95.3 77.512,98.762
  Bottom Layer w2.032: 77.512,98.762 88.4,109.65 88.4,137.976 93.724,143.3 101.074,143.3 111.724,132.65 pad.StartPad 116.586,131.398 pad.EndPad ; J2.5@116.061,130.744 116.087,130.756 116.906,131.138 J2.6@117.874,131.589
  other v1: 74.65,94 74.1,94.2 74.55,94.65
GND: J1.1 J1.2 J1.59 J1.60 J2.1 J2.2 J3.2 J3.4 J3.6 J3.8 J3.10 J3.12 J3.14 J3.16 J3.51 J3.53 J3.55 J3.57 J3.59 J4.4 pad.GND@41.094,112.05 pad.GND@78.994,124.86 pad.GND@116.884,137.67 | length 36.3
  Top Layer w1.524: v2(41.094,110.06) pad.GND@41.094,112.05 ; pad.GND@41.104,112.03 v2@41.104,114.71 ; v2(79.004,122.18) v2@79.004,127.51 ; v2(116.894,134.99) v2(116.894,140.29)
  Top Layer w2.032: v2(41.094,110.06) v2@41.094,114.68 ; v2(79.004,122.18) v2(79.004,127.48)
  Bottom Layer w0.203: v3(60.874,143.9) 61.524,143.4 J1.2 J1.1 65.224,144.65 v3(65.374,145.4) ; v3(65.274,131.85) 65.374,132.45 J1.60 J1.59 68.624,133.55 v3(69.024,133.15)
  Bottom Layer w0.254: v3(107.8,184.25) 108.1,184.25 J4.4@108.55,183.8
  other v1: 77.75,92.9 77.15,93.15 76.55,93.35 78,93.5 77.45,93.7 76.9,93.9 64.3,101.25 64.65,101.8 64.5,102.4 65,102.8 64.8,103.35 65.35,103.7 65.15,104.25 65.5,105.25
  other v2: 41.094,114.71
PALM_A: J3.5 J4.2 | length 104.4
  Top Layer w0.254: J3.5 65.45,97.35 v1(65.4,98.1)
  Mid-Layer 2 w0.254: v1(65.4,98.1) 65.5,98.75 67.4,103.75 73.55,130.5 107.05,185.75 v3(109.45,185.75)
  Bottom Layer w0.254: J4.2 v3@109.55,185.75
PALM_B: J3.7 J4.3 | length 102.4
  Top Layer w0.254: J3.7 66.15,97.85 v1(66.15,98.55)
  Mid-Layer 2 w0.254: v1(66.15,98.55) 67.95,103.65 74.05,130.1 107.4,185.25 108.45,185.25 v3(108.8,184.9)
  Bottom Layer w0.254: v3(108.8,184.9) 109.05,184.2 J4.3
pads on no net: J1.5 J1.6 J1.7 J1.8 J1.9 J1.10 J1.53 J1.54 J1.55 J1.56 J1.MNT J3.MNT J4.MNT

## Polygon pours and split planes (outlines as drawn)
GND on Mid-Layer 1 "gnd" (solid, remove dead copper, pour order 4): 129.324,189.7 27.474,189.65 25.974,183.4 26,113.35 27.75,110.9 30.25,109.15 52.6,109.15 54.45,110 56.35,111.9 60.898,121.93 65.974,121.95 65.974,107.35 63.1,99.45 64.65,98.85 63.9,96.6 82.3,89.8 83.2,92.05 85.1,91.3 88.474,100.95 89.274,104.5 89.424,107.8 89.424,122.25 90.85,122.25 92.3,122.85 93.75,124.05 98.604,134.82 106.834,134.82 106.834,124.07 122.304,131.33 122.304,134.95 126,134.95 127.85,136.4 129.3,138.25

## Other copper
Top Layer:
  region net GND: 68.85,99 69.3,100.25 68.2,106.75 65.7,107.2 63.6,100.9
  region net CAM_PWR: 75.35,92.05 74.7,92.3 75.1,93.55 75.2,94.3 75.45,94.65 75.9,94.55 76,93.85
  region net F2_POWER: 67.85,94.75 68.45,96.4 68.45,97.4 67.9,97.6 67.25,96.9 66.65,95.2
  region net F3_POWER: 74.45,92.35 73.25,92.775 73.95,94.675 74.45,95.05 74.9,94.9 74.9,94.55 74.95,94.15 74.9,93.65 74.85,93.475
  region net F0_POWER: 72.525,93.025 72.975,94.225 72.925,94.625 72.925,94.875 73.225,95.175 73.45,95.35 73.5,95.6 73.35,95.85 72.7,95.9 72.4,95.8 72.325,95.575 72.325,95.225 72.225,94.975 71.825,94.725 71.375,93.475
  region net GND: 77.725,91.125 75.575,91.925 76.175,93.525 76.525,93.825 76.725,94.325 78.425,93.675 78.175,93.175 78.125,92.225
  region net F1_POWER: 70.2,93.85 70.65,95.1 70.8,95.65 70.65,96.4 70.3,96.6 69.7,96.15 69,94.3
Bottom Layer:
  region net F3_POWER: 74.5,95.6 74.25,95 73.8,94.35 73.8,94 74.7,93.65 74.9,93.85 75,94.1 75.1,94.85
  region net F0_POWER: 72.35,95.9 72.3,95.6 72.3,95.25 72.25,94.7 72.3,94.55 72.6,94.45 72.85,94.6 72.95,94.95 73.4,95.3 73.55,95.75
  region net F1_POWER: 70.05,96.8 70,96.5 69.65,96 69.5,95.6 69.6,95.45 70.45,95.1 70.75,95.35 70.85,95.7 70.7,96.3 70.85,96.55
  region net F2_POWER: 67.8,97.85 67.8,97.4 67.2,96.8 67.2,96.5 68.25,96.1 68.45,96.35 68.45,97.15 68.8,97.75

## Silkscreen, mask and mechanical layers (free items; w line width, h text height)
Top Overlay:
  text "A" at 119.15,141.8 h1.02
  text "B" at 111.5,141.75 h1.02
  text "+" at 113.8,141.5 h1.52
  text "-" at 116.5,141.5 h1.52
  text "+" at 116.05,132.15 h1.52 r25
  text "B" at 113.2,131.25 h1.02 r25
  text "A" at 111.6,130.5 h1.02 r25
  text "B" at 73.7,129.1 h1.02
  text "A" at 81.15,129.1 h1.02
  text "-" at 109.15,129.05 h1.52 r25
  text "+" at 76,128.85 h1.52
  text "-" at 78.5,128.85 h1.52
  text "SNL-4-1003 REV. A" at 29.35,125.45 h1.52
  text "B" at 35.85,115.8 h1.02
  text "A" at 43.3,115.8 h1.02
  text "+" at 38,115.6 h1.52
  text "-" at 40.6,115.6 h1.52
Bottom Overlay:
  text "SNL-5-1003 REV. A" at 54.2,122.95 h1.52
Mechanical 2:
  drawing of 3451 lines, arcs and shapes, not listed
Mechanical 3:
  drawing of 4949 lines, arcs and shapes, not listed
Mechanical 4:
  drawing of 3788 lines, arcs and shapes, not listed
Mechanical 5:
  lines w0.127: 89.722,121.282 93.402,121.282 99.294,134.095 106.115,134.095 106.114,122.8 123.124,130.75 123.115,134.095 130.115,134.095 130.115,199.95 ; 89.724,121.25 89.724,89.75 88.524,86.75 65.724,95.06 65.722,121.282 61.402,121.282 55.509,108.469 25.33,108.469 25.33,183.969 cw(c39.83,183.969) 48.709,195.433 ccw(c54.527,202.943) 63.708,200.504 cw(c77.722,196.782) 86.601,208.245 ccw(c92.419,215.756) 91.805,206.276
Mechanical 6:
  drawing of 3922 lines, arcs and shapes, not listed
outline:
  lines w0.127: 61.14,120.725 cw(c62.048,120.307) 62.048,121.307 ; 61.14,120.725 cw(c62.048,120.307) 62.048,121.307 ; 61.14,120.725 56.854,111.405 cw(c52.311,113.494) 52.311,108.494 30.336,108.494 cw(c30.336,113.494) 25.336,113.494 25.336,183.994 cw(c39.836,183.994) 48.715,195.457 ccw(c54.532,202.968) 63.714,200.529 cw(c77.728,196.807) 86.607,208.27 ccw(c92.425,215.781) 101.606,213.342 cw(c115.62,209.62) 130.12,209.62 130.12,139.12 cw(c125.12,139.12) 125.12,134.12 124.12,134.12 ccw(c124.12,133.12) 123.12,133.12 123.12,130.62 106.12,122.692 106.12,133.12 ccw(c105.12,133.12) 105.12,134.12 99.941,134.12 ccw(c99.941,133.12) 99.032,133.537 94.746,124.218 cw(c90.204,126.307) 91.057,121.38 ccw(c91.228,120.395) 90.228,120.395 90.228,107.715 cw(c65.228,107.715) 88.72,99.165 85.508,90.309 83.95,90.9 83.1,88.7 62.8,96.15 63.55,98.25 62,98.85 65.168,107.55 ccw(c64.228,107.892) 65.228,107.892 65.228,120.307 ; 62.048,121.307 64.228,121.307 ; 64.228,121.307 cw(c64.228,120.307) 65.228,120.307 ; 64.228,121.307 cw(c64.228,120.307) 65.228,120.307 ; 113.224,207.702 cw(c114.171,208.022) 113.85,208.969 124.195,212.467 cw(c124.515,211.52) 125.463,211.84 126.536,208.666 cw(c125.589,208.345) 125.909,207.398 115.565,203.9 cw(c115.244,204.847) 114.297,204.527 113.224,207.702
import2:
  circle w0.127: c58.782,122.825 r1.25
  circle w0.127: c96.674,137.766 r1.25
  circle w0.127: c77.728,154.807 r1.55
  circle w0.127: c39.836,141.994 r1.55
  circle w0.127: c115.62,167.62 r1.55
  circle w0.127: c115.62,195.62 r1.55
  circle w0.127: c77.728,182.807 r1.55
  circle w0.127: c39.836,169.994 r1.55
  circle w0.127: c96.674,182.766 r1.25
  circle w0.127: c58.782,169.953 r1.25
  circle w0.127: c36.026,112.064 r1.018
  circle w0.127: c38.566,112.064 r1.018
  circle w0.127: c41.106,112.064 r1.018
  circle w0.127: c43.646,112.064 r1.018
  circle w0.127: c73.918,124.877 r1.018
  circle w0.127: c76.458,124.877 r1.018
  circle w0.127: c78.998,124.877 r1.018
  circle w0.127: c81.538,124.877 r1.018
  circle w0.127: c111.81,137.69 r1.018
  circle w0.127: c114.35,137.69 r1.018
  circle w0.127: c116.89,137.69 r1.018
  circle w0.127: c119.43,137.69 r1.018
  lines w0.127: 25.336,113.494 ccw(c30.336,113.494) 30.336,108.494 52.311,108.494 ccw(c52.311,113.494) 56.854,111.405 61.14,120.725 cw(c62.048,120.307) 62.048,121.307 64.228,121.307 cw(c64.228,120.307) 65.228,120.307 65.228,107.892 cw(c64.228,107.892) 65.168,107.55 61.224,96.715 84.717,88.165 88.72,99.165 ccw(c65.228,107.715) 90.228,107.715 90.228,120.395 cw(c91.228,120.395) 91.057,121.38 ccw(c90.204,126.307) 94.746,124.218 99.032,133.537 cw(c99.941,133.12) 99.941,134.12 105.12,134.12 cw(c105.12,133.12) 106.12,133.12 106.12,122.692 123.12,130.62 123.12,133.12 cw(c124.12,133.12) 124.12,134.12 125.12,134.12 ccw(c125.12,139.12) 130.12,139.12 130.12,209.62 ccw(c115.62,209.62) 101.606,213.342 cw(c92.425,215.781) 86.607,208.27 ccw(c77.728,196.807) 63.714,200.529 cw(c54.532,202.968) 48.715,195.457 ccw(c39.836,183.994) 25.336,183.994 25.336,113.494 ; 108.521,127.529 108.974,127.74 109.186,127.287 108.733,127.076 108.521,127.529 ; 110.334,128.374 110.787,128.586 110.998,128.133 110.545,127.921 110.334,128.374 ; 112.147,129.22 112.6,129.431 112.811,128.978 112.358,128.767 112.147,129.22 ; 113.224,207.702 cw(c114.171,208.022) 113.85,208.969 124.195,212.467 cw(c124.515,211.52) 125.463,211.84 126.536,208.666 cw(c125.589,208.345) 125.909,207.398 115.565,203.9 cw(c115.244,204.847) 114.297,204.527 113.224,207.702 ; 113.959,130.065 114.412,130.276 114.624,129.823 114.17,129.612 113.959,130.065 ; 115.772,130.91 116.225,131.121 116.436,130.668 115.983,130.457 115.772,130.91 ; 117.584,131.755 118.038,131.967 118.249,131.514 117.796,131.302 117.584,131.755
border:
  lines w0.127: -4.746,60.212 0.334,60.212 ; -4.746,120.537 0.334,120.537 ; -4.746,180.862 0.334,180.862 ; 51.804,236.107 51.804,241.187 ; 58.754,-0.113 58.754,4.967 ; 115.304,236.107 115.304,241.187 ; 122.254,-0.113 122.254,4.967 ; 185.754,-0.113 185.754,4.967 ; 185.754,236.107 185.754,241.187 ; 249.254,-0.113 249.254,4.967 ; 249.254,236.107 249.254,241.187 ; 256.874,12.587 371.174,12.587 ; 256.874,20.207 371.174,20.207 ; 256.874,27.827 294.974,27.827 ; 294.974,4.967 294.974,20.207 294.974,35.447 ; 312.754,-0.113 312.754,4.967 ; 312.754,236.107 312.754,241.187 ; 348.314,4.967 348.314,20.207 ; 371.174,60.212 376.254,60.212 ; 371.174,120.537 376.254,120.537 ; 371.174,180.862 376.254,180.862 ; 256.874,4.967 221.314,4.967 221.314,35.447 256.874,35.447 ; 256.874,4.967 371.174,4.967 ; 256.874,4.967 256.874,35.447 ; 256.874,35.447 294.974,35.447 ; 294.974,35.447 371.174,35.447 371.174,4.967 ; 371.174,4.967 371.174,236.107 0.334,236.107 0.334,4.967 371.174,4.967 ; -4.746,-0.113 -4.746,241.187 376.254,241.187 376.254,-0.113 -4.746,-0.113
  text "2" at 82.97,237.885 h1.78
  text "3" at 153.149,237.885 h1.78
  text "4" at 216.818,237.885 h1.78
  text "5" at 280.293,237.885 h1.78
  text "6" at 343.92,237.885 h1.78
  text "1" at 21.3,237.85 h1.78
  text "A" at -2.841,208.853 h1.78
  text "A" at 373.079,208.853 h1.78
  text "B" at -2.841,148.401 h1.78
  text "B" at 373.079,148.401 h1.78
  text "C" at -2.841,88.076 h1.78
  text "C" at 373.079,88.076 h1.78
  text "ENGINEER:" at 258.144,32.907 h1.14
  text "TITLE:" at 296.244,32.907 h1.14
  text "M. Quigley" at 259.134,28.772 h2.54
  text "LEFT CONNECTOR BOARD" at 298.534,28.372 h2.54
  text "D" at -2.841,27.878 h1.78
  text "D" at 373.079,27.878 h1.78
  text "PCB DESIGNER:" at 258.144,25.414 h1.14
  text "M. Quigley" at 259.284,21.722 h2.54
  text "Open Source" at 228.934,21.172 h2.29
  text "DATE:" at 258.144,17.667 h1.14
  text "PART NO.:" at 296.244,17.667 h1.14
  text "REV:" at 349.584,17.667 h1.14
  text "Robotics Foundation" at 223.634,16.922 h2.29
  text ".PRINT_DATE" at 259.414,14.619 h1.78
  text "A" at 350.834,13.922 h2.54
  text "FILE NAME:" at 258.144,10.047 h1.14
  text "DWG NO:" at 296.244,10.047 h1.14
  text "SCALE:" at 349.584,10.047 h1.14
  text ".PCB_FILE_NAME_NO_PATH" at 259.414,6.999 h1.78
  text "NONE" at 350.934,6.422 h2.54
  text "1" at 26.53,1.665 h1.78
  text "2" at 89.92,1.665 h1.78
  text "3" at 153.149,1.665 h1.78
  text "4" at 216.818,1.665 h1.78
  text "5" at 280.293,1.665 h1.78
  text "6" at 343.92,1.665 h1.78
Drill Drawing:
  text ".legend" at 263.1,61.15 h1.52
fabrication:
  lines w0.254: 111.821,210.024 112.8,208.75 ; 111.969,211.15 112.8,208.75 ; 112.56,208.667 113.04,208.833 ; 112.782,210.356 112.8,208.75 ; 114.36,203.467 114.84,203.633 ; 114.618,201.944 114.6,203.55 ; 114.982,202.364 115.148,201.884 ; 115.431,201.15 114.6,203.55 ; 115.579,202.276 114.6,203.55 ; 116.34,203.102 115.065,202.124 ; 116.672,202.142 115.065,202.124 ; 117.111,202.831 115.065,202.124 ; 125.319,205.667 127.365,206.374 ; 125.759,206.357 127.365,206.374 ; 126.091,205.396 127.365,206.374 ; 127.282,206.614 127.448,206.134 ; 212.049,213.047 261.579,213.047
  lines w0.356: 186.824,80.844 252.776,80.844 ; 186.824,87.136 252.776,87.136 ; 185.3,54.332 ccw(c187.332,54.332) 187.332,52.3 252.268,52.3 ccw(c252.268,54.332) 254.3,54.332 254.3,92.818 ccw(c252.268,92.818) 252.268,94.85 187.332,94.85 ccw(c187.332,92.818) 185.3,92.818 185.3,54.332
  text "NOTES: (UNLESS OTHERWISE SPECIFIED)" at 212.684,214.317 h1.78
  text "5.503" at 109.073,208.337 h1.52 r289.09
  text "1.  ALL DIMENSIONS ARE IN MILLIMETERS UNLESS OTHERWISE NOTED." at 216.494,207.967 h1.78
  text "2.  FABRICATE PCB IN ACCORDANCE WITH LATEST IPC-6011 AND IPC-6012, CLASS 2." at 216.494,203.522 h1.78
  text "13.014" at 117.65,202.05 h1.52 r19.06
  text "3.  MATERIALS:" at 216.494,199.077 h1.78
  text "LAMINATE MATERIAL MUST BE ABLE TO WITHSTAND A LEAD FREE PROFILE." at 221.574,195.902 h1.78
  text "USE HIGH TEMP FR-4 MATERIAL OR EQUIVALENT." at 221.574,192.727 h1.78
  text "MUST MEET UL 94V-0 FLAMMABILITY RATING." at 221.574,189.552 h1.78
  text "COPPER FOIL TO BE IN ACCORDANCE WITH IPC-MF-150, OUTER LAYER 1.0 OZ FINISHED." at 221.574,186.377 h1.78
  text "OVERALL THICKNESS TO BE .062\" +/- .005." at 221.574,183.202 h1.78
  text "4.  HOLE SIZES IN DRILL CHART ARE FINISHED DIAMETERS, AND IN INCHES." at 216.494,178.507 h1.78
  text "LAYER TO LAYER REGISTRATION SHALL BE WITHIN 0.003" at 221.574,175.332 h1.78
  text "ALL HOLES SHALL BE LOCATED WITHIN 0.003 RADIUS OF TRUE POSITION (RTP)." at 221.574,172.157 h1.78
  text "PLATED-THROUGH HOLES SHALL HAVE A TOLERANCE OF: +0.003/-0.003 FOR HOLE SIZES." at 221.574,168.982 h1.78
  text "5.  ALL PLATED-THROUGH HOLES AND CONDUCTIVE SURFACES SHALL BE PLATED WITH" at 216.494,164.537 h1.78
  text "A MINIMUM THICKNESS OF 0.001 COPPER." at 221.574,161.362 h1.78
  text "6.  FINISH:" at 216.494,156.917 h1.78
  text "SURFACE FINISH TO BE ELECTROLESS NICKEL/IMMERSION GOLD PER IPC-4552." at 221.574,153.742 h1.78
  text "NICKEL THICKNESS 120-240 MICROINCHES, GOLD THICKNESS 2.0-8.0 MICROINCHES." at 221.574,150.567 h1.78
  text "7.  SOLDER MASK:" at 216.494,146.122 h1.78
  text "BLACK LIQUID PHOTOIMAGEABLE (LPI) SOLDERMASK SHALL BE APPLIED PER" at 221.324,142.797 h1.78
  text "LATEST PC-SM-840, CLASS H, OVER BARE COPPER (SMOBC) TO BOTH SIDES OF THE BOARD." at 221.324,139.622 h1.78
  text "8.  SILKSCREEN:" at 216.044,132.327 h1.78
  text "SHALL BE APPLIED WITH WHITE NON-CONDUCTIVE PERMANENT EPOXY INK." at 221.124,129.152 h1.78
  text "THERE SHALL BE NO SILKSCREEN ON ANY SOLDERABLE COMPONENT PAD." at 221.124,125.977 h1.78
  text "9.  TOLERANCES:" at 216.044,121.532 h1.78
  text "BOW AND TWIST OF THE BOARD SHALL NOT EXCEED 0.75%." at 221.124,118.357 h1.78
  text "CONDUCTOR WIDTHS AND SPACING SHALL BE WITHIN +/-0.002 OF GERBER DATA." at 221.124,115.182 h1.78
  text "REMOVE ALL BURRS AND BREAK SHARP EDGES 0.012 MAX." at 221.124,112.007 h1.78
  text "10.  PLEASE NOTE THE INTERIOR CUTOUT IN THE UPPER CORNER OF THE PCB." at 216.144,106.982 h1.78
  text "11.  THE FRONT SIDE OF THE PCB HAS THREE GROUPS OF FOUR GOLD PADS. THESE ARE" at 216.094,102.732 h1.78
  text "POGO PIN TARGETS. PLEASE DO NOT APPLY SOLDER TO THEM." at 222.424,99.207 h1.78
  text "Layer Stack Up Detail for: left_conn.PcbDoc" at 186.824,89.809 h1.52
  text "Layer" at 186.824,84.787 h1.45
  text "Gerber" at 213.731,84.787 h1.45
  text "Copper" at 232.813,84.787 h1.45
  text "Name" at 186.824,81.891 h1.45
  text "Document" at 213.731,81.891 h1.45
  text "Thickness" at 232.813,81.891 h1.45
  text "Top Layer" at 186.824,76.3 h2.03
  text "(.GTL)" at 213.731,76.3 h2.03
  text "1.4mil" at 232.813,76.3 h2.03
  text "Mid-Layer 1" at 186.824,70.479 h2.03
  text "(.G1)" at 213.731,70.479 h2.03
  text "0.7mil" at 232.813,70.479 h2.03
  text "Mid-Layer 2" at 186.824,64.657 h2.03
  text "(.G2)" at 213.731,64.657 h2.03
  text "0.7mil" at 232.813,64.657 h2.03
  text "Bottom Layer" at 186.824,58.835 h2.03
  text "(.GBL)" at 213.731,58.835 h2.03
  text "1.4mil" at 232.813,58.835 h2.03
  text "Fabrication Drawing" at 298.584,23.522 h2.54
  text "SNL-5-1003" at 298.084,13.772 h2.54
  text "SNL-5-1003-FAB" at 298.3,6.4 h2.54
assembly:
  lines w0.254: 212.049,212.847 261.579,212.847
  text "NOTES: (UNLESS OTHERWISE SPECIFIED)" at 212.684,214.117 h1.78
  text "1.  ASSEMBLE BOARD PER IPC-A-610, CLASS 2 MINIMUM USING A LEAD-FREE (ROHS) PROCESS" at 216.494,207.767 h1.78
  text "2.  INDIVIDUALLY PLACE PCA IN ANTI-STATIC BAG PER EIA-525. PROTECT IN SHIPPING" at 216.494,203.322 h1.78
  text "CONTAINER TO PREVENT DAMAGE UNDER NORMAL TRANSPORT AND HANDLING." at 221.374,200.302 h1.78
  text "3.  MATERIAL REQUIREMENTS ARE SPECIFIED ON A SEPARATE BOM. ALTERNATE" at 216.594,195.627 h1.78
  text "MATERIAL SHALL NOT BE USED UNLESS APPROVED IN WRITING." at 221.674,192.452 h1.78
  text "4.  TOP-SIDE HEADER J2 EXTENDS BEYOND THE OUTLINE OF THE PCB. THIS IS BY DESIGN." at 216.694,189.127 h1.78
  text "5.  THE FRONT SIDE OF THE PCBA HAS THREE GROUPS OF FOUR GOLD PADS. THESE ARE" at 216.744,184.332 h1.78
  text "POGO PIN TARGETS. PLEASE DO NOT APPLY SOLDER TO THEM." at 221.9,180.9 h1.78
  text "Assembly Drawing" at 298.584,23.322 h2.54
  text "SNL-4-1003" at 297.984,13.772 h2.54
  text "SNL-4-1003-ASY" at 298.284,6.372 h2.54

## Dimensions
25.33,108.469 to 130.184,139.12 on border
130.115,134.095 to 130.184,209.62 on border
39.83,183.969 to 24,193.9 on border
54.532,202.968 to 58.55,197.8 on border
124.515,211.52 to 126.35,215.55 on border